# Altium PCB [PCB]_MotherBoard.PcbDoc
Units mm, origin at the board's own origin, x right, y up, seen from the top; angles counter-clockwise.
Board outline 95 x 100 mm, 2 copper layers (Top Layer, Bottom Layer); 132 components, 88 nets, 421 pads, 0 vias.
Unrouted connection lines stored in the file: 259.
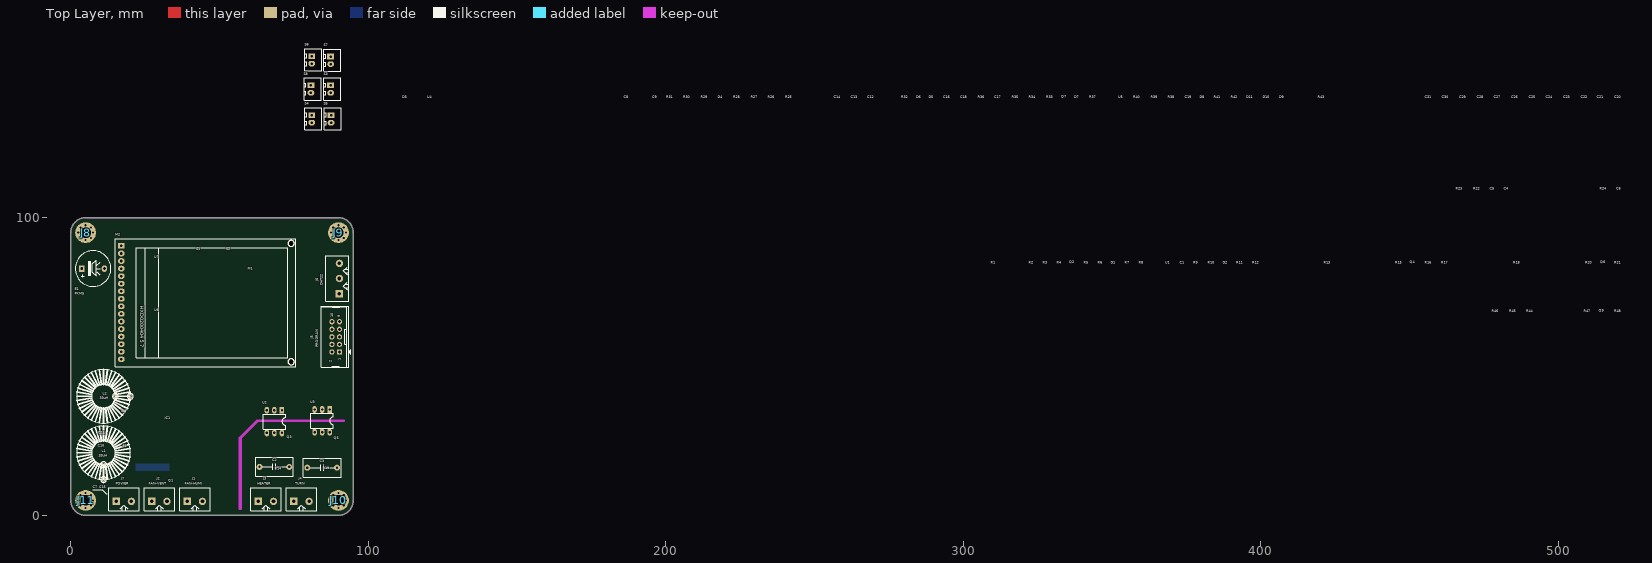
[diagram p0: Top Layer view]
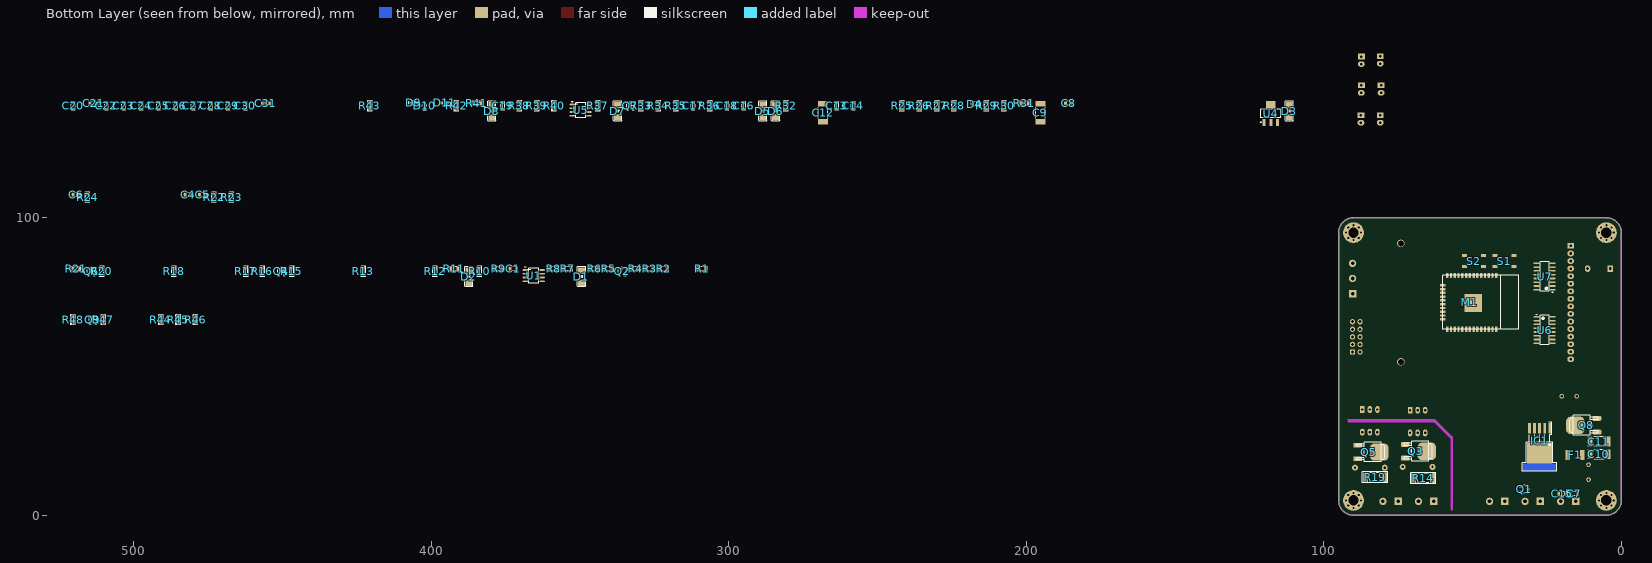
[diagram p1: Bottom Layer view, seen from below]

## Layer stack, top to bottom
Top Solder: solder mask 0.0102, Solder Resist, Dk 3.5
Top Layer: signal copper 0.0356
Dielectric 1: dielectric 0.32, FR-4, Dk 4.8
Bottom Layer: signal copper 0.0356
Bottom Solder: solder mask 0.0102, Solder Resist, Dk 3.5

## Board outline
0,5 0,95 cw(c5,95) 5,100 90,100 cw(c90,95) 95,95 95,5 cw(c90,5) 90,0 5,0 cw(c5,5)
cut-out: 56.619,2.25 56.619,26 cw(c57,26) 56.731,26.27 62.48,32.019 cw(c62.75,31.75) 62.75,32.131 91.5,32.131 cw(c91.5,31.75) 91.881,31.75 cw(c91.5,31.75) 91.5,31.368 62.908,31.368 57.381,25.842 57.381,2.25 cw(c57,2.25)

## Design rules (kind name [scope] priority, off if disabled: settings)
Clearance [All] p1: gap=0.254 ignorepadtopadclearanceinfootprint=FALSE except(0: Arc-Hole Track-Hole SMDPad-Hole THPad-Hole Via-Hole Fill-Hole Poly-Hole Region-Hole Text-Hole)
PolygonConnect [All] p1: connectstyle=Relief reliefconductorwidth=0.254 reliefentries=4 polygonreliefangle="90 Angle" airgapwidth=0.254
RoutingVias [All] p1: holewidth=0.711 width=1.27 viastyle="Through Hole" minholewidth=0.711 minwidth=1.27 maxholewidth=0.711 maxwidth=1.27
SolderMaskExpansion [All] p1: expansion=0.102
Width [All] p1: maxlimit=0.254 minlimit=0.254 preferedwidth=0.254
30 further rules are at their usual default settings.

## Classes and differential pairs
net class "ADC_DATA - 150mil": LCD_OE LCD_RCLK LCD_SER LCD_SRCLK
component class [SCH]_Power: C7 C8 C9 C10 C11 C12 C13 C14 C15 C16 C17 C18 C19 C20 C21 C22 C23 C24 C25 C26 C27 C28 C29 C30 C31 D3 D4 D5 D6 D7 D8 D9 D10 D11 F1 IC1 J7 J8 J9 J10 J11 L1 L2 M1 Q7 Q8 R25 R26 R27 R28 R29 R30 R31 R32 R33 R34 R35 R36 R37 R38 R39 R40 R41 R42 R43 U4 U5
component class [SCH]_MainProcessor: C4 C5 C6 J5 J6 R22 R23 R24 S1 S2
component class [SCH]_IO: C1 C2 C3 D1 D2 J1 J2 J3 J4 Q1 Q2 Q3 Q4 Q5 Q6 R1 R2 R3 R4 R5 R6 R7 R8 R9 R10 R11 R12 R13 R14 R15 R16 R17 R18 R19 R20 R21 U1 U2 U3
component class [SCH]_HMI: E1 M2 Q9 R44 R45 R46 R47 R48 S3 S4 S5 S6 S7 S8 U6 U7

## Components (designator, comment, footprint, x,y, rotation, side; value= is the part's Value field where it differs from the comment)
C1 "104" CAP-SMD-0805 372.437,82.855 r180 bottom
C2 "104" Cap-Mica-10-6.2x12.5x10.5 68.46,16.25 r180 top
C3 "104" Cap-Mica-10-6.2x12.5x10.5 84.5,16 r180 top
C4 "103" CAP-SMD-0805 481.657,107.747 r180 bottom
C5 "103" CAP-SMD-0805 476.831,107.747 r180 bottom
C6 "102" CAP-SMD-0805 519.376,107.747 r180 bottom
C7 "104" CAP-SMD-0805 15.861,7.25 r180 bottom
C8 "104" CAP-SMD-0805 185.747,138.481 r180 bottom
C9 "226" CAP-SMD-2512 195.272,135.306 r90 bottom
C10 "226" CAP-SMD-2512 7.5,20.5 r180 bottom
C11 "226" CAP-SMD-2512 7.5,24.75 r180 bottom
C12 "226" CAP-SMD-2512 268.297,135.306 r90 bottom
C13 "105" CAP-SMD-0805 263.725,137.592 r90 bottom
C14 "103" CAP-SMD-0805 258.137,137.592 r90 bottom
C15 "104" CAP-SMD-0805 19.861,7.25 r180 bottom
C16 "104" CAP-SMD-0805 294.967,137.592 r90 bottom
C17 "104" CAP-SMD-0805 311.985,137.592 r90 bottom
C18 "104" CAP-SMD-0805 300.555,137.592 r90 bottom
C19 "104" CAP-SMD-0805 375.993,137.592 r90 bottom
C20 "104" CAP-SMD-0805 520.392,137.592 r90 bottom
C21 "104" CAP-SMD-0805 513.534,138.481 r180 bottom
C22 "104" CAP-SMD-0805 509.216,137.592 r90 bottom
C23 "106" CAP-SMD-0805 503.374,137.592 r90 bottom
C24 "104" CAP-SMD-0805 497.532,137.592 r90 bottom
C25 "104" CAP-SMD-0805 491.69,137.592 r90 bottom
C26 "104" CAP-SMD-0805 485.848,137.592 r90 bottom
C27 "106" CAP-SMD-0805 480.006,137.592 r90 bottom
C28 "104" CAP-SMD-0805 474.164,137.592 r90 bottom
C29 "104" CAP-SMD-0805 468.322,137.592 r90 bottom
C30 "104" CAP-SMD-0805 462.48,137.592 r90 bottom
C31 "106" CAP-SMD-0805 455.622,138.481 r180 bottom
D1 "1N4001" DIO-SMD-106 349.577,80.188 r90 bottom
D2 "1N4001" DIO-SMD-106 387.423,80.188 r90 bottom
D3 "1N4001" DIO-SMD-106 111.579,135.814 r90 bottom
D4 "BAT60" SOD-323 217.243,138.227 r180 bottom
D5 "6V" DIO-SMD-106 288.617,135.814 r90 bottom value=24.4V
D6 "9V" DIO-SMD-106 284.299,135.814 r90 bottom value=24.4V
D7 "1N4001" DIO-SMD-106 337.385,135.814 r90 bottom
D8 "1N4001" DIO-SMD-106 379.676,135.814 r90 bottom
D9 "12V" LED0603-IPC 405.965,138.608 r180 bottom
D10 "5V" LED0603-IPC 402.282,137.719 r90 bottom
D11 "3.3V" LED0603-IPC 395.551,138.608 r180 bottom
E1 "PKM5" BUZZER 3.69,82.93 r0 top
F1 "2A" "Fuse-SMD 1813" 15.5,20.287 r0 bottom
IC1 "LM2596" TO263 27.45,20.83 r0 bottom
J1 "FAN-HUMI" KF2/5.08 41.74,4.673 r0 top
J2 "FAN-VENT" KF2/5.08 29.801,4.673 r0 top
J3 "HEATER" KF2/5.08 65.619,4.673 r0 top
J4 "TURN" KF2/5.08 77.559,4.673 r0 top
J5 "PROGRAM" IDC10 88.93,59.989 r90 top
J6 "DHT22" KF3/5.08 90.327,79.599 r90 top
J7 "POWER" KF2/5.08 17.861,4.673 r0 top
J8 "MASS 3MM" MY_PAD_3MM 5,95 r0 top
J9 "MASS 3MM" MY_PAD_3MM 90,95 r0 top
J10 "MASS 3MM" MY_PAD_3MM 90,5 r0 top
J11 "MASS 3MM" MY_PAD_3MM 5,5 r0 top
L1 "33uH" 5026_INDUCTOR 11,21 r90 top
L2 "33uH" 5026_INDUCTOR 11,40 r180 top
M1 "ESP32-S" ESP32-S-Footprint 60.034,80.61 r270 bottom
M2 "ST7775R" LCD_176X220_MODULE 22,90 r270 top
Q1 "AO3416" SOT23(123) 32.536,8.75 r270 bottom
Q2 "NPN" SOT23(123) 335.861,81.966 r180 bottom
Q3 "BT137" TO252AA 68.55,21.5 r270 bottom
Q4 "C1815" SOT23(123) 450.415,81.966 r180 bottom
Q5 "BT137" TO252AA 84.5,21.25 r270 bottom
Q6 "C1815" SOT23(123) 514.296,81.966 r180 bottom
Q7 "C1815" SOT23(123) 333.067,137.592 r180 bottom
Q8 "BT136" TO252AA 12.25,30.25 r90 bottom
Q9 "C1815" SOT23(123) 513.788,65.71 r180 bottom
R1 "RES-2512-4.7R" RES-SMD-0805 308.937,82.855 r180 bottom value=4.7
R2 "RES-2512-4.7R" RES-SMD-0805 321.891,82.855 r180 bottom value=4.7
R3 "RES-2512-4.7R" RES-SMD-0805 326.59,82.855 r180 bottom value=10K
R4 "RES-2512-4.7R" RES-SMD-0805 331.289,82.855 r180 bottom value=1K
R5 "RES-2512-4.7R" RES-SMD-0805 340.433,82.855 r180 bottom value=10K
R6 "RES-2512-4.7R" RES-SMD-0805 345.132,82.855 r180 bottom value=10K
R7 "RES-2512-4.7R" RES-SMD-0805 354.149,82.855 r180 bottom value=10K
R8 "RES-2512-4.7R" RES-SMD-0805 358.848,82.855 r180 bottom value=10K
R9 "RES-2512-4.7R" RES-SMD-0805 377.263,82.855 r180 bottom value=10K
R10 "RES-2512-4.7R" RES-SMD-0805 383.74,81.966 r90 bottom value=10K
R11 "RES-2512-4.7R" RES-SMD-0805 392.249,82.855 r180 bottom value=10K
R12 "RES-2512-4.7R" RES-SMD-0805 398.726,81.966 r90 bottom value=47
R13 "RES-2512-4.7R" RES-SMD-0805 422.856,81.966 r90 bottom value=4.7K
R14 "RES" RES-SMD-2512 66.55,12.5 r0 bottom value=39
R15 "RES-2512-4.7R" RES-SMD-0805 446.859,81.966 r90 bottom value=1K
R16 "RES-2512-4.7R" RES-SMD-0805 456.765,81.966 r90 bottom value=10K
R17 "RES-2512-4.7R" RES-SMD-0805 462.353,81.966 r90 bottom value=47
R18 "RES-2512-4.7R" RES-SMD-0805 486.483,81.966 r90 bottom value=4.7K
R19 "RES" RES-SMD-2512 82.75,12.75 r0 bottom value=39
R20 "RES-2512-4.7R" RES-SMD-0805 510.74,81.966 r90 bottom value=1K
R21 "RES-2512-4.7R" RES-SMD-0805 519.376,82.855 r180 bottom value=10K
R22 "R0805" RES-SMD-0805 473.021,106.858 r90 bottom value=10K
R23 "R0805" RES-SMD-0805 467.179,106.858 r90 bottom value=10K
R24 "R0805" RES-SMD-0805 515.566,106.858 r90 bottom value=10K
R25 "R0805" RES-SMD-0805 241.754,137.592 r90 bottom value=1K
R26 "R0805" RES-SMD-0805 235.912,137.592 r90 bottom value=220
R27 "R0805" RES-SMD-0805 230.07,137.592 r90 bottom value=10K
R28 "R0805" RES-SMD-0805 224.228,137.592 r90 bottom value=47K
R29 "R0805" RES-SMD-0805 213.306,137.592 r90 bottom value=10K
R30 "R0805" RES-SMD-0805 207.464,137.592 r90 bottom value=10K
R31 "R0805" RES-SMD-0805 200.606,138.481 r180 bottom value=10K
R32 "R0805" RES-SMD-0805 280.743,137.592 r90 bottom value=47K
R33 "R0805" RES-SMD-0805 329.511,137.592 r90 bottom value=10K
R34 "R0805" RES-SMD-0805 323.669,137.592 r90 bottom value=10K
R35 "R0805" RES-SMD-0805 317.827,137.592 r90 bottom value=10K
R36 "R0805" RES-SMD-0805 306.397,137.592 r90 bottom value=10K
R37 "R0805" RES-SMD-0805 343.989,137.592 r90 bottom value=10K
R38 "R0805" RES-SMD-0805 370.405,137.592 r90 bottom value=10K
R39 "R0805" RES-SMD-0805 364.563,137.592 r90 bottom value=10K
R40 "R0805" RES-SMD-0805 358.721,137.592 r90 bottom value=10K
R41 "R0805" RES-SMD-0805 384.756,138.481 r180 bottom value=100
R42 "R0805" RES-SMD-0805 391.487,137.592 r90 bottom value=10K
R43 "R0805" RES-SMD-0805 420.697,137.592 r90 bottom value=330
R44 "RES-2512-4.7R" RES-SMD-0805 490.928,65.71 r90 bottom value=10K
R45 "RES-2512-4.7R" RES-SMD-0805 485.086,65.71 r90 bottom value=10K
R46 "RES-2512-4.7R" RES-SMD-0805 479.244,65.71 r90 bottom value=10K
R47 "RES-2512-4.7R" RES-SMD-0805 510.232,65.71 r90 bottom value=1K
R48 "RES-2512-4.7R" RES-SMD-0805 520.392,65.71 r90 bottom value=10K
S1 "RESET" TL3342F260QG 39.25,85.47 r0 bottom
S2 "BOOT" TL3342F260QG 49.5,85.47 r0 bottom
S3 "TEMP+" "Header 2P" 87.362,143.27 r270 top
S4 "RH+" "Header 2P" 81,133.25 r270 top
S5 "TURN+" "Header 2P" 87.5,133.25 r270 top
S6 "TEMP-" "Header 2P" 81,153.09 r270 top
S7 "RH-" "Header 2P" 87.362,152.94 r270 top
S8 "TURN-" "Header 2P" 80.732,143.27 r270 top
U1 "LM358" SOIC-8S 365.579,80.569 r180 bottom
U2 "MOC3020Z" DIP6 68.46,31.5 r180 top
U3 "MOC3020Z" DIP6 84.5,31.75 r180 top
U4 "AMS1117" SOT223(1234) 117.802,135.052 r180 bottom
U5 "LM358" SOIC-8S 349.831,136.195 r180 bottom
U6 "74595" SOIC-16S 25.75,62.25 r180 bottom
U7 "74595" SOIC-16S 25.75,80.25 r0 bottom

## Footprints (in the part's own frame and the unit in brackets; to place one, negate y for a bottom-side part, rotate by r counter-clockwise, add the part's x,y. Pads: shape width x height; smd on the part's side, far side on the other; paste and mask are expansions set on the pad)
5026_INDUCTOR [mm]
  round 1.524 hole 0.8: 1(-9,0) 2(-4,0)
  silkscreen extent -10,-9 9,9
BUZZER [mm]
  rect 1.8x2.2 hole 0.9: A(0,0)
  oval 1.8x2.2 hole 0.9: K(7.62,0)
  silkscreen extent -2.19,-6 9.81,6, body extent -2.19,-6 9.81,6, height 9
Cap-Mica-10-6.2x12.5x10.5 [mm]
  round 2 hole 0.8: 1(-5.004,0) 2(5.004,0)
  silkscreen extent -6.35,-3.18 6.35,3.18, body extent -6.25,-3.1 6.25,3.1, height 10.49
CAP-SMD-0805 [mil]
  rect 39.37x55 smd: 1(-45,0) 2(45,0)
  silkscreen extent -23,-26 22,26, body extent -39,-25 39,25, height 30
CAP-SMD-2512 [mm] "Chip Capacitor, Body 3.2x2.5mm, IPC Medium Density"
  rect 1.8x3.3 smd: 1(-3,0) 2(3,0)
  silkscreen extent -1.8,-1.6 1.8,1.6, body extent -3.47,-1.61 3.47,1.61, height 3.21
DIO-SMD-106 [mil]
  rect 90x90.55 smd: 1(80,0) 2(-80,0)
  silkscreen extent -130,-55 135,55, body extent -99,-50 106,52, height 95
DIP6 [mm]
  rect 1.5x2.3 hole 0.8: 1(-2.54,-3.81)
  oval 1.5x2.3 hole 0.8: 2(0,-3.81) 3(2.54,-3.81) 4(2.54,3.81) 5(0,3.81) 6(-2.54,3.81)
  silkscreen extent -3.81,-2.54 3.81,2.54, body extent -4.02,-4 4.06,4, height 4.31
ESP32-S-Footprint [mm]
  rect 1.8x0.8 smd: 1(0,18.034) 2(0,16.764) 3(0,15.494) 4(0,14.224) 5(0,12.954) 6(0,11.684) 7(0,10.414) 8(0,9.144) 9(0,7.874) 10(0,6.604) 11(0,5.334) 12(0,4.064) 13(0,2.794) 14(0,1.524) 25(18.034,1.524) 26(18.034,2.794) 27(18.034,4.064) 28(18.034,5.334) 29(18.034,6.604) 30(18.034,7.874) 31(18.034,9.144) 32(18.034,10.414) 33(18.034,11.684) 34(18.034,12.954) 35(18.034,14.224) 36(18.034,15.494) 37(18.034,16.764) 38(18.034,18.034)
  rect 0.8x1.8 smd: 15(3.3,0.034) 16(4.57,0.034) 17(5.84,0.034) 18(7.11,0.034) 19(8.38,0.034) 20(9.65,0.034) 21(10.92,0.034) 22(12.19,0.034) 23(13.46,0.034) 24(14.73,0.034)
  rect 6x6 smd: 101(9.3,10.3)
  silkscreen extent 0,0 18.03,25.53, body extent 0,0 18.03,25.53, height 2
"Fuse-SMD 1813" [mil]
  rect 60x135 smd: 1(-95,0) 2(95,0)
  body extent -93,-67 93,67, height 53
"Header 2P" [mil] "CON2"
  rect 75x90 hole 34: 1(-50,0)
  oval 75x90 hole 34: 2(50,0)
  silkscreen extent -147,-91 147,134, body extent -148,-90 148,134, height 277
IDC10 [mil]
  rect 70x70 hole 40: 1(-200,-55)
  round 70 hole 40: 2(-200,45) 3(-100,-55) 4(-100,45) 5(0,-55) 6(0,45) 7(100,-55) 8(100,45) 9(200,-55) 10(200,45)
  silkscreen extent -405,-205 405,186, body extent -400,-178 400,180, height 366
KF2/5.08 [mm]
  rect 2.5x2.5 hole 1.2: 1(-2.54,0)
  round 2.5 hole 1.2: 2(2.54,0)
  silkscreen extent -5.08,-3.17 5.08,4.57, body extent -5.6,-3 5,4.6, height 10.1
KF3/5.08 [mm]
  rect 2.5x2.5 hole 1.2: 1(-5.08,0)
  round 2.5 hole 1.2: 2(0,0) 3(5.08,0)
  silkscreen extent -7.62,-3.18 7.62,4.57, body extent -8.1,-3 7.5,4.6, height 10.1
LCD_176X220_MODULE [mm]
  rect 1.905x2.286 hole 0.864: 1(-0.55,-5)
  round 2.5 hole 2: 2(-1.4,52.1) 2(38.4,52.1)
  oval 1.905x2.286 hole 0.864: 2(1.99,-5) 3(4.53,-5) 4(7.07,-5) 5(9.61,-5) 6(12.15,-5) 7(14.69,-5) 8(17.23,-5) 9(19.77,-5) 10(22.31,-5) 11(24.85,-5) 12(27.39,-5) 13(29.93,-5) 14(32.47,-5) 15(35.01,-5) 16(37.55,-5)
  silkscreen extent -3,-7 40,53.7
LED0603-IPC [mm]
  rect 1.1x1 smd: A(0.85,0) K(-0.85,0)
  silkscreen extent -1.68,-0.7 0.25,0.7, body extent -0.8,-0.4 0.8,0.4, height 1.1
MY_PAD_3MM [mil]
  round 50 hole 28: 0(-98.43,0) 0(-69.6,-69.6) 0(-69.6,69.6) 0(0,-98.43) 0(0,98.43) 0(69.6,-69.6) 0(69.6,69.6) 0(98.43,0)
  round 275.59 hole 137.8: 0(0,0)
RES-SMD-0805 [mil]
  rect 39.37x55 smd mask+1.97: 1(-45,0) 2(45,0)
  silkscreen extent -67,-30 67,30, body extent -45,-27 45,27, height 30
RES-SMD-2512 [mm] "Chip Capacitor, Body 3.2x2.5mm, IPC Medium Density"
  rect 1.8x3.3 smd: 1(-3.2,0) 2(3.2,0)
  silkscreen extent -4.28,-1.83 4.28,1.83, body extent -3.2,-1.6 3.2,1.6, height 0.6
SOD-323 [mm] "BAT54H Single Shottkey Diode"
  rect 0.9x0.83 smd: 1(-1.1,0) 2(1.1,0)
  silkscreen extent -1.52,-0.75 0.87,0.77, body extent -1.25,-0.68 1.25,0.67, height 0.8
SOIC-8S [mm] "SOIC, 8-Leads, Body 4.9x3.9mm, Pitch 1.27mm, IPC High Density"
  oval 1.8x0.6 smd: 1(-2.825,1.905) 2(-2.825,0.635) 3(-2.825,-0.635) 4(-2.825,-1.905) 5(2.825,-1.905) 6(2.825,-0.635) 7(2.825,0.635) 8(2.825,1.905)
  silkscreen extent -2.95,-2.55 1.68,2.98, body extent -2.99,-2.45 3,2.45, height 1.6
SOIC-16S [mm] "SOIC, 16-Leads, Body 9.90x3.91mm, Pitch 1.27mm, IPC Medium Density"
  oval 2x0.55 smd: 1(-2.7,4.445) 2(-2.7,3.175) 3(-2.7,1.905) 4(-2.7,0.635) 5(-2.7,-0.635) 6(-2.7,-1.905) 7(-2.7,-3.175) 8(-2.7,-4.445) 9(2.7,-4.445) 10(2.7,-3.175) 11(2.7,-1.905) 12(2.7,-0.635) 13(2.7,0.635) 14(2.7,1.905) 15(2.7,3.175) 16(2.7,4.445)
  silkscreen extent -2.83,-4.95 1.55,5.39, body extent -3,-4.95 3,4.95, height 1.4
SOT23(123) [mm]
  rect 0.9x0.95 smd: 1(-0.95,-1.2) 2(0,1.2) 3(0.95,-1.2)
  silkscreen extent -1.3,-0.38 1.3,1.25, body extent -1.52,-1.23 1.48,1.27, height 1.06
SOT223(1234) [mm]
  rect 1x2.4 smd: 1(-2.3,-3) 2(0,-3) 3(2.3,-3)
  rect 3.3x2.4 smd: 4(0,3)
  silkscreen extent -3.48,-3.02 3.35,1.4, body extent -3.25,-3.56 3.25,3.4, height 1.68
TL3342F260QG [mm] "SWITCH TACTILE SPST-NO 0.05A 12V"
  rect 1.7x1 smd: 1(-3.15,-1.9) 2(3.15,-1.9) 3(-3.15,1.9) 4(3.15,1.9)
  body extent -3.3,-2.5 3.3,2.5, height 1.52
TO252AA [mm]
  rrect50% 1.6x3 smd: 1(-2.286,-4.064) 3(2.286,-4.064)
  rrect50% 5.8x6.2 smd: 2(0,3.175)
  silkscreen extent -3.3,-4.45 3.3,5.08, body extent -3.3,-4.82 3.28,5.32, height 2.3
TO263 [mm]
  rect 0.9x3.58 smd: 1(-3.4,-8.42) 2(-1.7,-8.42) 3(0,-8.42) 4(1.7,-8.42) 5(3.4,-8.42)
  rect 8.5x7 smd: 3(0,0)
  Top Layer region: -5.6,5.842 5.6,5.842 5.6,3.454 -5.6,3.454
  silkscreen extent -5.8,-10.44 5.8,6.07, body extent -5.08,-9.42 5.08,5.22, height 4.57

## Part data
C1 C4 C5 C6 C7 C8 C13 C14 C15 C16 C17 C18 C19 C20 C21 C22 C23 C24 C25 C26 C27 C28 C29 C30 C31: library part Cap-Non-SMD, "Non-polar capacitor"
C2 C3: library part Cap-Non-DIP, "Non-polar capacitor", Price=0.005
C9 C10 C11 C12: library part Cap-Pol-SMD, "Non-polar capacitor"
D1 D2 D3 D7 D8: "1.0A RECTIFIER", ComponentLink1Description=Datasheet, ComponentLink1URL="E:\NEW_DATA\ELECTRONIC_DOCUMENT\DATASHEET\1N4001 (2).pdf"
D4: "DIODE SCHOTTKY 10V 3A SOD323-2", Supplier Part Number 1=BAT60BE6327HTSA1CT-ND, Manufacturer Part No=BAT60, Supplier 1=Digi-Key
D5 D6: library part ZENER, "DIODE-ZNR 5.1V 5% PD=1W IR=10uA", Manufacturer="Littlefuse Inc.", Part Number=SMF22A, Supplier Part Number 1=F5822CT-ND, Manufacturer’s ordering code=SMF22A, Supplier 1=Digi-Key, Supplier 2=Mouser, Supplier 3=LCSC, Supplier Part Number 2=576-SMF22A, Supplier Part Number 3=C169431
D9: library part "LED 0603 Red", "LED RED CLEAR 0603 SMD", Supplier Part Number 1=732-4979-1-ND, Supplier 1=Digi-Key
D10: library part "LED 0603 Yellow", "LED YELLOW CLEAR 0603 SMD", Supplier Part Number 1=732-4981-1-ND, Supplier 1=Digi-Key
D11: library part "LED 0603 Green", "LED GREEN CLEAR 0603 SMD", Supplier Part Number 1=732-4971-1-ND, Supplier 1=Digi-Key
E1: library part BUZZER, "ALARM-AUDIBLE PIEZO ALARM PIN TYPE; 5V"
F1: library part "Fuse SMD"
IC1: "Power IC", Max Input Voltage="12 V", Max Output Current="3 (6.0 peak) A", Max Output Voltage=mV, Temperature Range="-40 to +125 degC", Category=IC-Power, Min Input Voltage=mV, Min Output Voltage=mV, Mounting Technology="Surface Mount", Status=Unreleased, Supply Voltage=mV
J1 J2 J3 J4: library part JP2
J5: library part IDE_5X2, "Male Box Header WR-BHD, THT, Vertical, pitch 2.54 mm, 10 pins"
J6: library part JP3
J7: library part JP2_IN
J8 J9 J10 J11: library part JP1_IN, "3MM PAD"
L1 L2: library part INDUCTOR_FE, "2.2µH Shielded Wirewound Inductor 8.2A 10mOhm Max Nonstandard, 4 Lead", Supplier Part Number 1=811-3603-1-ND, Supplier 1=Digi-Key, Supplier 2=Mouser, Supplier Part Number 2=580-482R2SC
M1: "Tensilica Xtensa LX6 microprocessor @ 160 or 240 MHz · 320 KiB SRAM", Max CPU Freq="240 MHz", Nominal Supply Current="500 mA", Supply Voltage="2.7 ~ 3.6 V", Temperature Range="-40 to +85 degC", Bandwidth="72 MHz", ComponentLink1Description=PCB, ComponentLink1URL=https://evertdekker.com/wp/?p=854, CPU Name=ESP32-D0WDQ6, Data Rate="150 Mbps", Height="3.2 mm", Interface="Ethernet, I2C, I2S, SPI, UART", Number of ADC Channels=16, Number of cores=2, Number of GPIO=32
M2: library part LCD_176x220, ComponentLink1Description=Wiki, ComponentLink1URL=http://www.lcdwiki.com/2.8inch_SPI_Module_ILI9341_SKU:MSP2807
Q1: library part IRFR3910TRLPBF, "N-Channel 16A (Tc) 79W (Tc) Surface Mount D-Pak", Supplier Part Number 1=IRFR3910TRLPBFCT-ND, Price=0.15, Supplier 1=Digi-Key, Supplier 2=Mouser, Supplier 3=LCSC, Supplier Part Number 2=942-IRFR3910TRLPBF, Supplier Part Number 3=C148158
Q2: "Transistor, NPN, RF, 50mA, 12V", Supplier Part Number 1=568-11514-1-ND, Supplier 1=Digi-Key
Q3 Q5 Q8: library part SCR, "THYRISTOR-TRIAC TO-220AB VRRM=600"
Q4 Q6 Q7 Q9: library part NPN, "Transistor, NPN, RF, 50mA, 12V", Supplier Part Number 1=568-11514-1-ND, Supplier 1=Digi-Key
R1 R2 R3 R4 R5 R6 R7 R8 R9 R10 R11 R12 R13 R15 R16 R17 R18 R20 R21 R22 R23 R24 R25 R26 R27 R28 R29 R30 R31 R32 R33 R34 R35 R36 R37 R38 R39 R40 R41 R42 R43 R44 R45 R46 R47 R48: library part RES, "Chip Resistor, 0805, 1%, 1/8 W", Supplier Part Number 1=311-1.00KLRCT-ND, PackageDescription="Chip Resistor", PackageReference=J1-0805, Price=0.005
R14 R19: "Chip Resistor, 0805, 1%, 1/8 W", Supplier Part Number 1=311-1.00KLRCT-ND, PackageDescription="Chip Resistor", PackageReference=J1-0805, Price=0.005
S1 S2 S3 S4 S5 S6 S7 S8: library part "SWITCH TACTILE SPST", "SWITCH TACTILE SPST-NO 0.05A 12V", Manufacturer Part Number=TL3342F260QG, Supplier Part Number 1=EG5470CT-ND, Supplier 1=Digi-Key
U1 U5: "7mV 250nA 7uV/C 1MHz 0.6V/uS 0.8mA 3-32V", Price=0.24
U2 U3: "OPTO-ISOLATOR LED-PTRIAC IF=50mA-max"
U4: "1A Bipolar Linear Regulator", ComponentLink1Description=Datasheet, ComponentLink1URL=E:\NEW_DATA\ELECTRONIC_DOCUMENT\DATASHEET\AMS1117-1-2_C475600.pdf
U6 U7: "CD74HC595 8-Bit Shift Registers With 3-State Output Registers"

## Nets (pads, with @x,y where several pads share a name; then routed paths per layer and width w, separated by ;. In a path a pad name is that pad's centre, name@x,y a point inside that pad or via, vN(x,y) a via of type N, cw(c..) or ccw(c..) an arc to the next point about the centre after c; other vN are vias at no path point)
+3.3V: C13.2 C14.2 C20.2 C21.2 C22.2 C23.2 C24.2 C25.2 C26.2 C27.2 C28.2 C29.2 C30.2 C31.2 D1.2 D2.2 J5.2 J6.1 M1.2 M2.2 R7.2 R22.2 R23.2 R24.2 R31.2 R40.2 U4.2 U4.4 U6.10 U6.16 U7.10 U7.16
+5V: E1.A R12.2 R13.1 R17.2 R18.1
+5V_USB: C9.1 C12.1 L2.2 R29.2 R39.2 U4.3
+6V: C16.2 D5.2 R26.1 R30.2
BUZZER: M1.26 R47.1 R48.1
DTH22: C6.2 J6.2 R24.1
ESP32_EN: C4.2 J5.1 M1.3 R22.1 S1.1
ESP32_IO0: C5.2 J5.6 M1.25 R23.1 S2.1
ESP32_RX0: J5.5 M1.34
ESP32_TX0: J5.3 M1.35
FANH: M1.16 R4.2 R5.2
FANH+: C8.2 C19.2 D3.2 F1.2 IC1.1 J1.1 J2.1 Q8.2 R3.2 R26.2 R27.2 R28.2 R38.2
FANH-: J2.2 Q1.2
FANH_FAIL: D1.1 M1.4 R8.2
FANV-: J1.2 R1.2 R10.1
FANV_FAIL: D2.1 M1.5 R11.2
GND: C1.1 C4.1 C5.1 C6.1 C9.2 C10.2 C11.2 C12.2 C13.1 C14.1 C15.1 C16.1 C17.1 C18.1 C19.1 C20.1 C21.1 C22.1 C23.1 C24.1 C25.1 C26.1 C27.1 C28.1 C29.1 C30.1 C31.1 D4.2 D5.1 D9.K D10.K D11.K IC1.3 J5.4 J6.3 J7.2 J8.0 J9.0 J10.0 J11.0 M1.1 M1.15 M1.38 M2.1 Q2.3 Q4.3 Q6.3 Q7.3 Q8.1 Q9.3 R1.1 R2.1 R5.1 R9.1 R16.2 R21.2 R25.1 R34.1 R35.1 R36.1 R37.1 R43.1 R44.2 R45.2 R46.2 R48.2 U4.1 U6.8 U7.8
HEATER: M1.24 R15.1 R16.1
KEY_DRV_0: M1.13 S3.1 S4.1 S5.1
KEY_DRV_1: M1.23 S6.1 S7.1 S8.1
KEY_SEN_0: M1.10 R44.1
KEY_SEN_1: M1.11 R45.1
KEY_SEN_2: M1.12 R46.1
LCD_CS: M2.3 U7.7
LCD_DB0: M2.9 U6.15
LCD_DB1: M2.10 U6.1
LCD_DB2: M2.11 U6.2
LCD_DB3: M2.12 U6.3
LCD_DB4: M2.13 U6.4
LCD_DB5: M2.14 U6.5
LCD_DB6: M2.15 U6.6
LCD_DB7: M2.16 U6.7
LCD_LED: M2.8 U7.1
LCD_OE: M1.33 U6.13 U7.13
LCD_RCLK: M1.37 U6.12 U7.12
LCD_RD: M2.6 U7.3
LCD_RS: M2.4 U7.5
LCD_RST: M2.7 U7.2
LCD_SER: M1.31 U6.14
LCD_SRCLK: M1.36 U6.11 U7.11
LCD_WR: M2.5 U7.4
NetC1_2: C1.2 R7.1 R9.2 U1.2 U1.6
NetC2_1: C2.1 J3.2 Q3.1
NetC2_2: C2.2 R14.1
NetC3_1: C3.1 J4.2 Q5.1
NetC3_2: C3.2 R19.1
NetC7_1: C7.1 C15.2
NetC7_2: C7.2 J7.1 L1.1
NetC8_1: C8.1 IC1.5 R32.1
NetC10_1: C10.1 C11.1 F1.1 L1.2 R25.2
NetC17_2: C17.2 R30.1 R35.2 U5.2 U5.6
NetC18_2: C18.2 R31.1 R36.2 R42.1
NetD3_1: D3.1 D4.1 IC1.2 L2.1
NetD6_1: D6.1 Q7.1 R37.2
NetD6_2: D6.2 R27.1
NetD7_1: D7.1 U5.1
NetD7_2: D7.2 D8.2 R41.1 R43.2
NetD8_1: D8.1 U5.7
NetD9_A: D9.A R38.1
NetD10_A: D10.A R39.1
NetD11_A: D11.A R40.1
NetIC1_4: IC1.4 R29.1 R33.2 R34.2
NetJ3_1: J3.1 Q3.2 R14.2 U2.6
NetJ4_1: J4.1 Q5.2 R19.2 U3.6
NetQ1_1: Q1.1 Q2.2 R3.1
NetQ1_3: Q1.3 R2.2 R6.1
NetQ2_1: Q2.1 R4.1
NetQ3_3: Q3.3 U2.4
NetQ4_1: Q4.1 R15.2
NetQ4_2: Q4.2 R13.2 U2.2
NetQ5_3: Q5.3 U3.4
NetQ6_1: Q6.1 R20.2
NetQ6_2: Q6.2 R18.2 U3.2
NetQ7_2: Q7.2 R28.1 R32.2
NetQ8_3: Q8.3 R41.2
NetQ9_1: Q9.1 R47.2
NetR6_2: R6.2 U1.3
NetR8_1: R8.1 U1.1
NetR10_2: R10.2 U1.5
NetR11_1: R11.1 U1.7
NetR12_1: R12.1 U2.1
NetR17_1: R17.1 U3.1
NetR33_1: R33.1 U5.3
NetR42_2: R42.2 U5.5
NetU6_9: U6.9 U7.14
TURN: R20.1 R21.1
V+: U1.8 U5.8
V-: U1.4 U5.4
pads on no net: E1.K J5.7 J5.8 J5.9 J5.10 M1.6 M1.7 M1.8 M1.9 M1.14 M1.17 M1.18 M1.19 M1.20 M1.21 M1.22 M1.27 M1.28 M1.29 M1.30 M1.32 M1.101 Q9.2 S1.2 S1.3 S1.4 S2.2 S2.3 S2.4 S3.2 S4.2 S5.2 S6.2 S7.2 S8.2 U2.3 U2.5 U3.3 U3.5 U7.6 U7.9 U7.15

## Polygon pours and split planes (outlines as drawn)
no net on Top Layer (solid, pour order 0): 157.75,63

## Keep-outs
Keep-Out Layer:
  lines w0.254: 0,5 ccw(c5,5) 5,0 90,0 ccw(c90,5) 95,5 95,95 ccw(c90,95) 90,100 5,100 ccw(c5,95) 0,95 0,5
  lines w0.762: 57,2.25 57,26 62.75,31.75 91.5,31.75

## Silkscreen, mask and mechanical layers (free items; w line width, h text height)
Top Overlay:
  lines w0.254: 7.436,8.5 10.626,8.5 11.876,7.25 12.236,7.25

## Text inside footprints (layer, text, board x,y; h text height)
J5: Top Overlay "10" at 88.523,66.491 h1.52 r90; Top Overlay "9" at 90.936,66.618 h1.52 r90; Top Overlay "2" at 88.041,51.48 h1.52 r90; Top Overlay "1" at 91.077,52.134 h1.52 r90
M2: Top Overlay "HXD0200404 5 7" at 22.869,70.5 h2 r270